# Altium PCB PCB1.PcbDoc
Units mm, origin at the board's own origin, x right, y up, seen from the top; angles counter-clockwise.
Board outline 47.4 x 63.98 mm, 2 copper layers (Top Layer, Bottom Layer); 38 components, 36 nets, 134 pads, 123 vias.
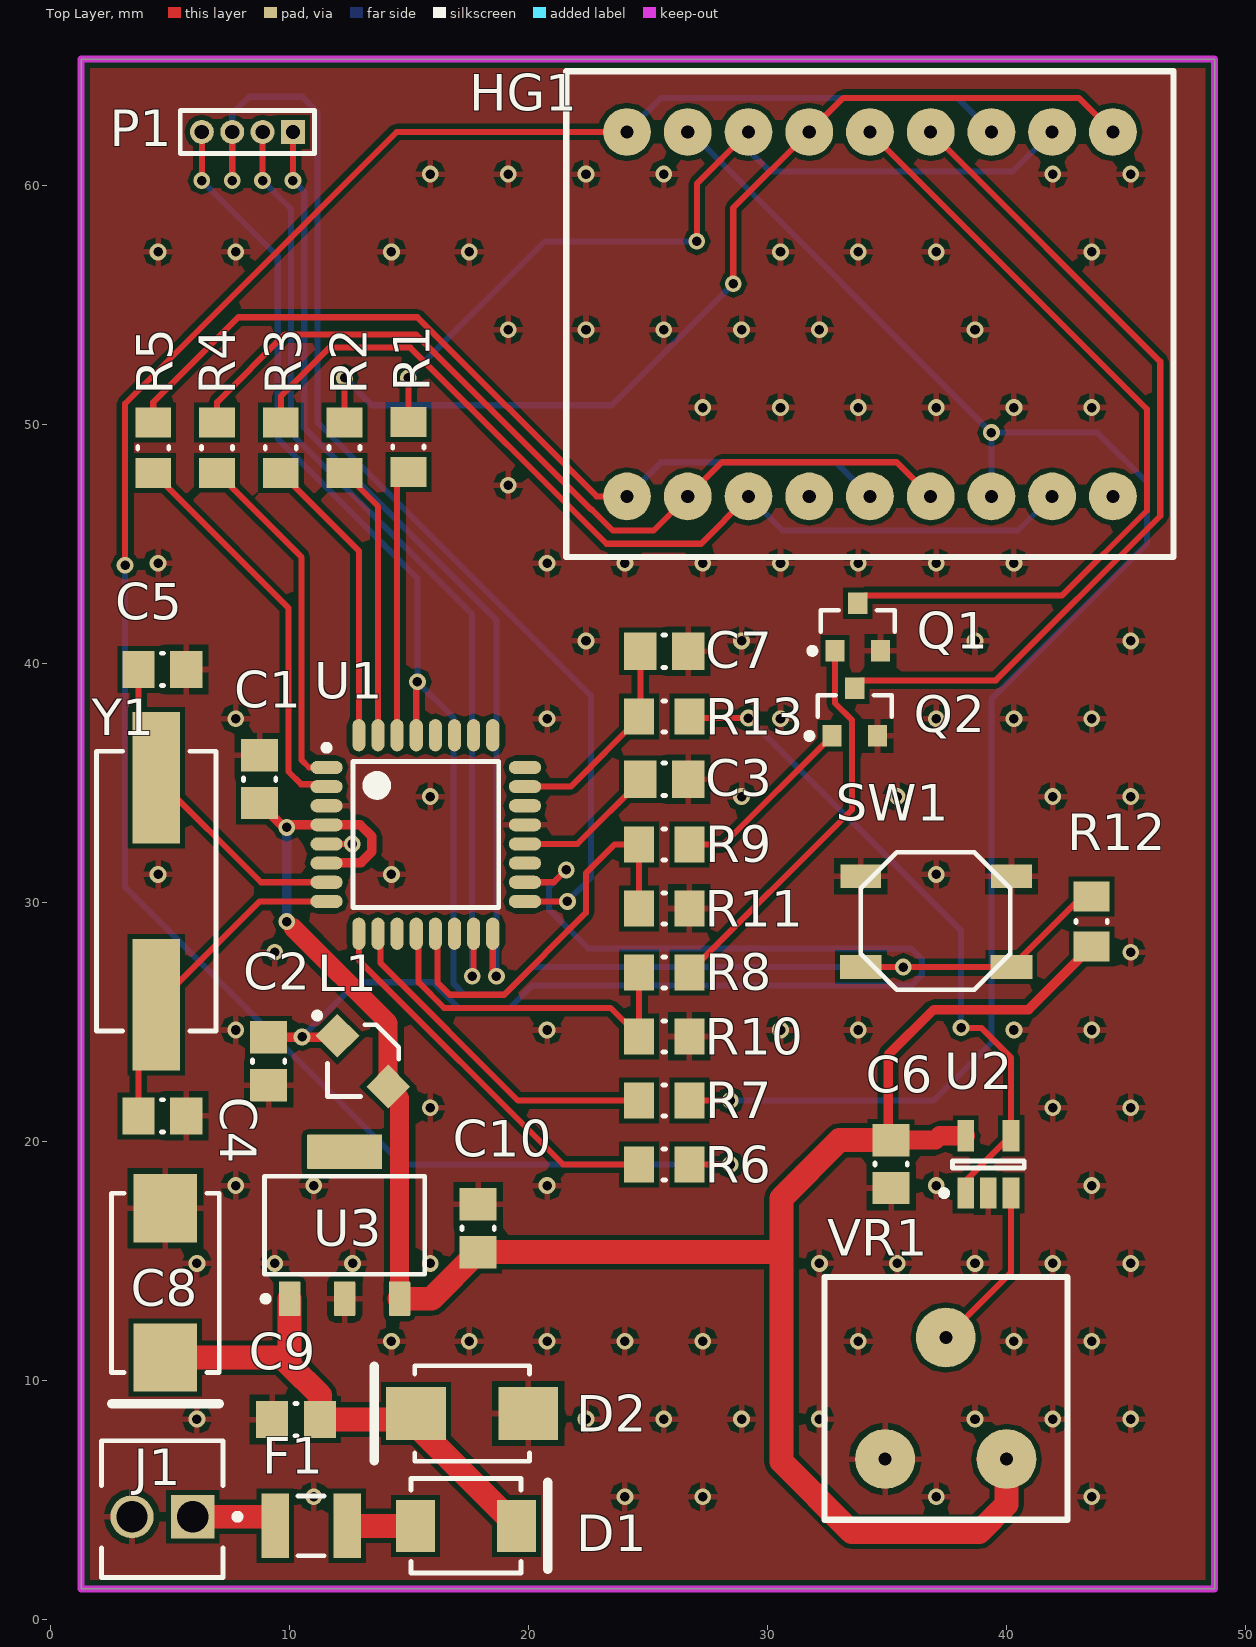
[diagram p0: Top Layer view]
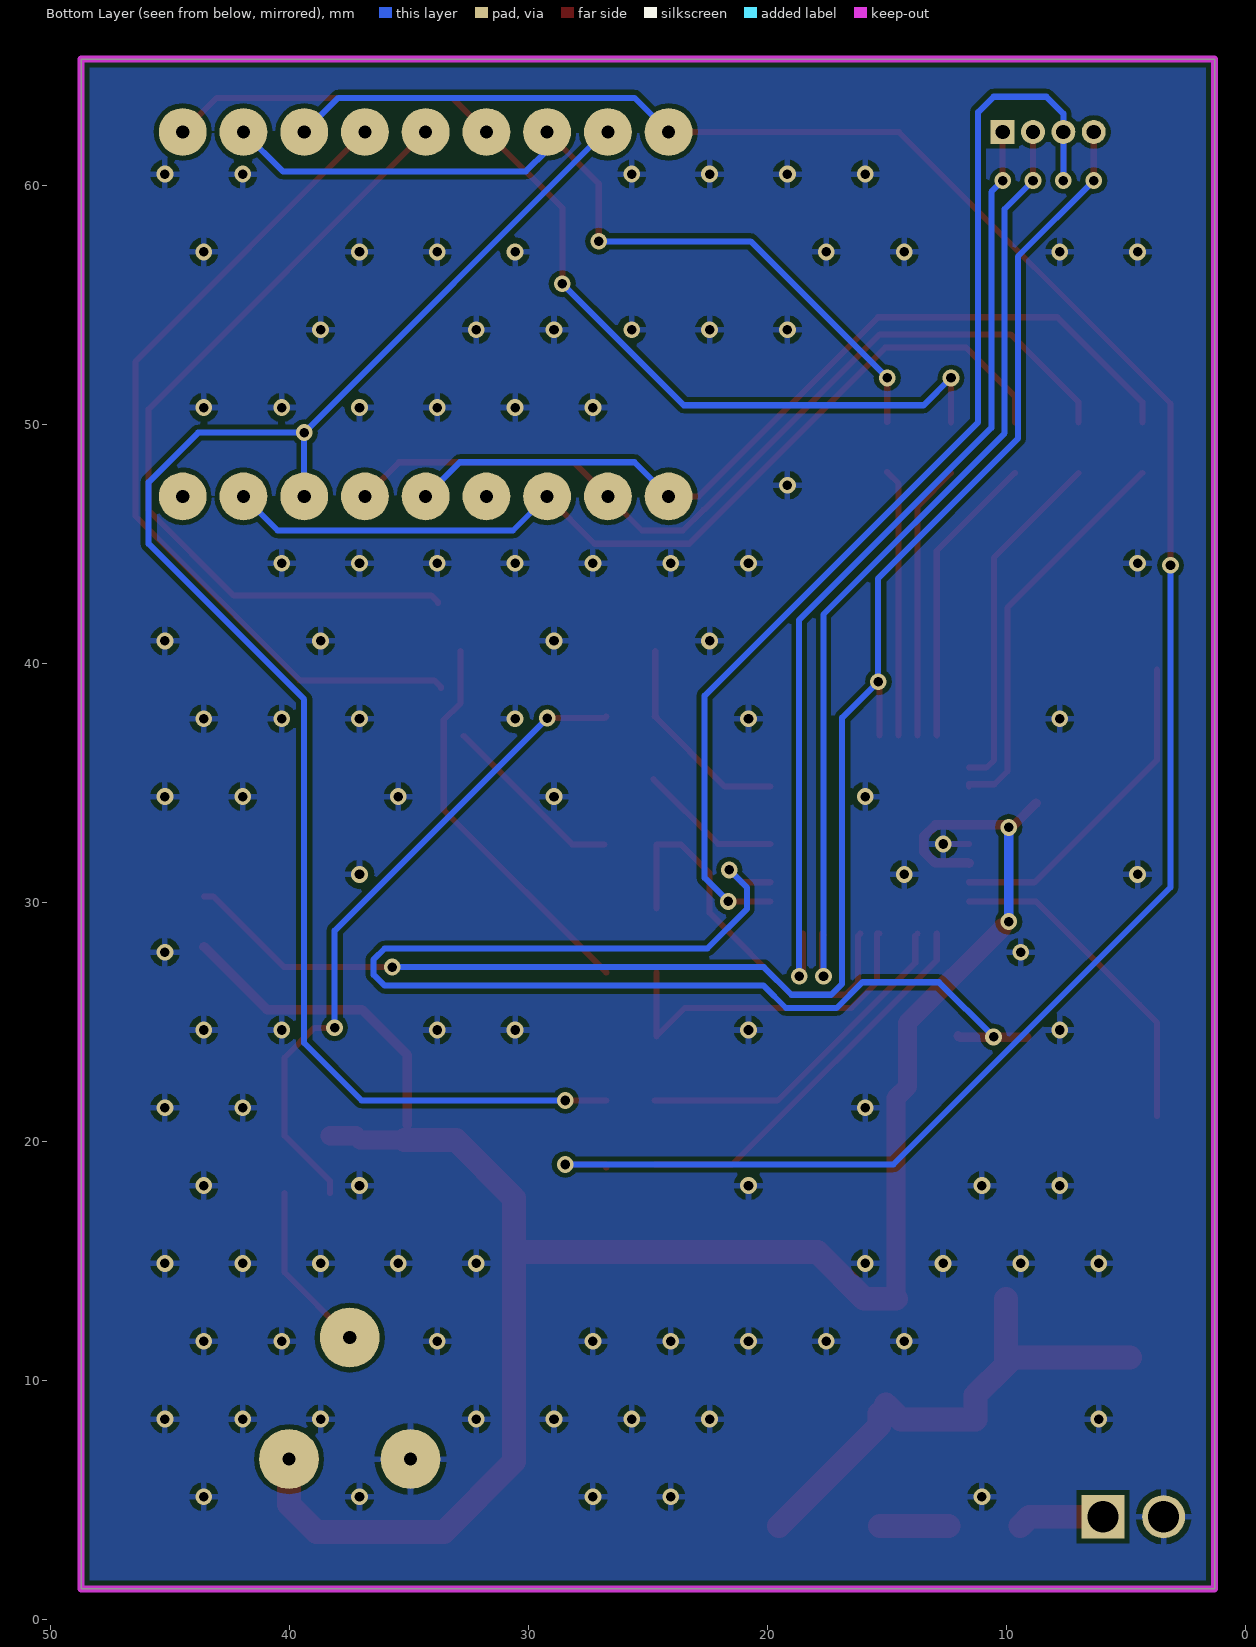
[diagram p1: Bottom Layer view, seen from below]

## Layer stack, top to bottom
Top Solder: solder mask 0.0102, Solder Resist, Dk 3.5
Top Layer: signal copper 0.0356
Dielectric 1: dielectric 0.32, FR-4, Dk 4.8
Bottom Layer: signal copper 0.0356
Bottom Solder: solder mask 0.0102, Solder Resist, Dk 3.5

## Board outline
1.3,1.3 48.7,1.3 48.7,65.278 1.3,65.278

## Design rules (kind name [scope] priority, off if disabled: settings)
Clearance [All] p1: gap=0.2 ignorepadtopadclearanceinfootprint=FALSE
PolygonConnect [All] p1: connectstyle=Relief reliefconductorwidth=0.254 reliefentries=4 polygonreliefangle="90 Angle" airgapwidth=0.254
RoutingVias [All] p1: holewidth=0.5 width=1 viastyle="Through Hole" minholewidth=0.4 minwidth=0.6 maxholewidth=0.711 maxwidth=1.27
SolderMaskExpansion [All] p1: expansion=0.102
Width [All] p1: maxlimit=5 minlimit=0.254 preferedwidth=0.254
Width Width_AVCC [InNet('NetC2_2')] p2: maxlimit=3 minlimit=0.4 preferedwidth=1
Width Width_VCC [InNet('VCC')] p3: maxlimit=3 minlimit=0.4 preferedwidth=1
30 further rules are at their usual default settings.

## Classes and differential pairs
component class programmer: P1
component class pm: C8 C9 C10 D1 D2 F1 J1 U3
component class OA: C6 C7 R13 U2 VR1
component class microcontroller: C1 C2 C3 C4 C5 HG1 L1 Q1 Q2 R1 R2 R3 R4 R5 R7 R8 R9 R12 R13 SW1 U1 Y1

## Components (designator, comment, footprint, x,y, rotation, side; value= is the part's Value field where it differs from the comment)
C1 "100nF" CAPC0805(2012)75_M 8.763,35.163 r270 top
C2 "100nF" CAPC0805(2012)75_M 9.144,23.368 r90 top
C3 "100nF" CAPC0805(2012)75_M 25.688,35.16 r180 top
C4 "22pF" CAPC0805(2012)100_M 4.699,21.082 r180 top
C5 "22pF" CAPC0805(2012)100_M 4.699,39.751 r180 top
C6 "100nF" CAPC0805(2012)75_M 35.179,19.066 r90 top
C7 "100nF" CAPC0805(2012)75_M 25.688,40.513 r180 top
C8 "293D476X0025D2TE3" AVX-7343-31_M 4.826,14.097 r90 top
C9 "330pF" CAPC0805(2012)100_M 10.287,8.382 r0 top
C10 "100nF" CAPC0805(2012)75_M 17.907,16.383 r270 top
D1 "STPS2L25U" STM-SMB_P_V 17.399,3.937 r0 top
D2 "SMBJ12A" FAIR-DO-214AA-2_V 17.653,8.636 r180 top
F1 "1210L050YR" "fuse - duplicate" 10.922,3.937 r0 top
HG1 "DC56-11SRWA" 7seg_LCD 24.13,46.99 r90 top
J1 "640456-2" TECO-640456-2_V 4.699,4.318 r0 top
L1 "CDRH2D18" SUMI-CDRH2D14NP-1R5NC-2_V 13.081,23.368 r0 top
P1 "MHDR1X4" MHDR1X4 10.16,62.23 r180 top
Q1 "IRLML2060TRPBF" INTR-IRLML2402TRPBF-3_V 33.782,41.529 r90 top
Q2 "IRLML2060TRPBF" INTR-IRLML2402TRPBF-3_V 33.655,37.973 r90 top
R1 "140R" RESC0805(2012)_M 14.986,49.056 r90 top value="140.00 Ohm"
R2 "140R" RESC0805(2012)_M 12.319,49.022 r90 top value="140.00 Ohm"
R3 "140R" RESC0805(2012)_M 9.652,49.022 r90 top value="140.00 Ohm"
R4 "140R" RESC0805(2012)_M 6.985,49.022 r90 top value="140.00 Ohm"
R5 "140R" RESC0805(2012)_M 4.318,49.022 r90 top value="140.00 Ohm"
R6 "140R" RESC0805(2012)_M 25.688,19.05 r0 top value="140.00 Ohm"
R7 "140R" RESC0805(2012)_M 25.688,21.727 r0 top value="140.00 Ohm"
R8 "270R" RESC0805(2012)_M 25.688,27.08 r0 top value="270.00 Ohm"
R9 "270R" RESC0805(2012)_M 25.688,32.433 r0 top value="270.00 Ohm"
R10 "10K" RESC0805(2012)_M 25.688,24.403 r180 top value="10000.00 Ohm"
R11 "10K" RESC0805(2012)_M 25.688,29.756 r180 top value="10000.00 Ohm"
R12 "10K" RESC0805(2012)_M 43.561,29.21 r270 top value="10000.00 Ohm"
R13 "330R" RESC0805(2012)_M 25.688,37.786 r180 top value="330.00 Ohm"
SW1 "8-1437565-1" SW-SPST-NO-4 33.909,31.105 r0 top
U1 "ATmega8-16AU" 32A_L 15.716,32.852 r0 top
U2 "AD8605ARTZ-REEL7" ADI-RJ-5_M 39.243,19.05 r90 top
U3 "LM340MP-5.0/NOPB" DCY0004A_L 12.319,16.51 r90 top
VR1 "RES-POT-3" RES-POT-3 37.465,11.811 r0 top
Y1 "KX-K 16.0 MHz" FOX-HC49SDLF_V 4.445,30.48 r90 top

## Footprints (in the part's own frame and the unit in brackets; to place one, negate y for a bottom-side part, rotate by r counter-clockwise, add the part's x,y. Pads: shape width x height; smd on the part's side, far side on the other; paste and mask are expansions set on the pad)
7seg_LCD [mm]
  round 2 hole 0.55: 1(0,0) 2(0,-2.54) 3(0,-5.08) 4(0,-7.62) 5(0,-10.16) 6(0,-12.7) 7(0,-15.24) 8(0,-17.78) 9(0,-20.32) 10(15.24,-20.32) 11(15.24,-17.78) 12(15.24,-15.24) 13(15.24,-12.7) 14(15.24,-10.16) 15(15.24,-7.62) 16(15.24,-5.08) 17(15.24,-2.54) 18(15.24,0)
  silkscreen extent -2.54,-22.86 17.78,2.54
32A_L [mm] "Thin QFP, 32-Leads, Body 7x7mm, Pitch 0.8mm, IPC High Density"
  oval 1.35x0.55 smd: 1(-4.15,2.8) 2(-4.15,2) 3(-4.15,1.2) 4(-4.15,0.4) 5(-4.15,-0.4) 6(-4.15,-1.2) 7(-4.15,-2) 8(-4.15,-2.8) 17(4.15,-2.8) 18(4.15,-2) 19(4.15,-1.2) 20(4.15,-0.4) 21(4.15,0.4) 22(4.15,1.2) 23(4.15,2) 24(4.15,2.8)
  oval 0.55x1.35 smd: 9(-2.8,-4.15) 10(-2,-4.15) 11(-1.2,-4.15) 12(-0.4,-4.15) 13(0.4,-4.15) 14(1.2,-4.15) 15(2,-4.15) 16(2.8,-4.15) 25(2.8,4.15) 26(2,4.15) 27(1.2,4.15) 28(0.4,4.15) 29(-0.4,4.15) 30(-1.2,4.15) 31(-2,4.15) 32(-2.8,4.15)
  silkscreen extent -4.27,-3.05 3.05,3.75, body extent -3.5,-3.5 3.5,3.5, height 1.2
ADI-RJ-5_M [mm] "SOT-23, 5-Leads, Body 2.9x1.6mm, Pitch 0.95mm, IPC Low Density"
  rect 1.3x0.7 smd: 1(-1.2,0.95) 2(-1.2,0) 3(-1.2,-0.95) 4(1.2,-0.95) 5(1.2,0.95)
  silkscreen extent -1.32,-1.5 0.15,1.97, body extent -0.85,-1.5 0.85,1.5, height 1.45
AVX-7343-31_M [mm] "Molded Capacitor, 2-Leads, Body 7.5x4.5mm, IPC Low Density"
  rect 2.85x2.65 smd: 1(-3.125,0) 2(3.125,0)
  silkscreen extent -5.05,-2.25 3.75,2.25, body extent -3.97,-2.25 3.97,2.25, height 3.1
CAPC0805(2012)75_M [mm] "Chip Capacitor, Body 2.0x1.2mm, Height 0.75mm, IPC Low Density"
  rect 1.35x1.55 smd: 1(-1,0) 2(1,0)
  silkscreen extent -0.05,-0.67 0.05,0.67, body extent -1.1,-0.72 1.1,0.72, height 0.75
CAPC0805(2012)100_M [mm] "Chip Capacitor, Body 2.0x1.2mm, Height 1.0mm, IPC Low Density"
  rect 1.35x1.55 smd: 1(-1,0) 2(1,0)
  silkscreen extent -0.05,-0.67 0.05,0.67, body extent -1.1,-0.72 1.1,0.72, height 1
DCY0004A_L [mm] "SOT223, 4-Leads, Body 6.7x3.7mm, Pitch 2.3mm, IPC High Density"
  rrect11% 1.45x0.9 smd: 1(-3.075,2.3) 2(-3.075,0) 3(-3.075,-2.3)
  rrect7% 1.45x3.15 smd: 4(3.075,0)
  silkscreen extent -3.2,-3.35 2.05,3.42, body extent -3.5,-3.25 3.5,3.25, height 1.62
FAIR-DO-214AA-2_V [mm] "Molded Diode, 2-Leads, Body 4.75x3.95mm"
  rect 2.5x2.2 smd: 1(-2.35,0) 2(2.35,0)
  silkscreen extent -2.4,-2 4.1,2, body extent -2.59,-1.97 2.6,1.98, height 2.65
FOX-HC49SDLF_V [mm] "SMD, 2-Leads, Body 5x11.7mm"
  rect 5.5x2 smd: 1(-4.75,0) 2(4.75,0)
  silkscreen extent -5.85,-2.5 5.85,2.5, body extent -6.15,-2.35 6.15,2.35, height 4.34
"fuse - duplicate" [mm] "fuse, Body 3.2x2.5mm, IPC Medium Density"
  rect 1.15x2.7 smd: 1(-1.5,0) 2(1.5,0)
  silkscreen extent -0.55,-1.25 0.55,1.25, body extent -1.7,-1.35 1.7,1.35, height 0.71
INTR-IRLML2402TRPBF-3_V [mm] "SOT23, 3-Leads, Body 3.05x1.4mm, Pitch 0.95mm"
  rect 0.9x0.8 smd: 1(-1,0.95) 2(-1,-0.95) 3(1,0)
  silkscreen extent -1.12,-1.55 0.7,2.02, body extent -0.7,-1.52 0.7,1.53, height 1.11
MHDR1X4 [mm] "Connector; Header; 4 Position"
  rect 1x1 hole 0.6: 1(0,0)
  round 1 hole 0.6: 2(1.27,0) 3(2.54,0) 4(3.81,0)
  silkscreen extent -0.9,-0.9 4.71,0.9
RES-POT-3 [mm]
  round 2.5 hole 0.55: 1(2.54,-5.08) 2(0,0) 3(-2.54,-5.08)
  silkscreen extent -5.08,-7.62 5.08,2.54
RESC0805(2012)_M [mm] "Chip Resistor, Body 2.0x1.3mm, IPC Low Density"
  rect 1.25x1.5 smd: 1(-1.05,0) 2(1.05,0)
  silkscreen extent -0.05,-0.65 0.05,0.65, body extent -1.1,-0.67 1.1,0.67, height 0.7
STM-SMB_P_V [mm] "SMB, 2-Leads, Body 4.325x3.625mm"
  rect 1.62x2.18 smd: 1(-2.11,0) 2(2.11,0)
  silkscreen extent -2.3,-1.97 3.42,1.97, body extent -2.16,-1.81 2.16,1.81, height 2.59
SUMI-CDRH2D14NP-1R5NC-2_V [mm] "Hand Drawn, 2-Leads, Body 3x3mm, Pitch 3mm"
  rect 1.3x1.3 smd rot 45: 1(-1.061,1.061) 2(1.061,-1.061)
  silkscreen extent -2.03,-1.48 1.5,2.03, body extent -1.48,-1.48 1.5,1.5, height 1.55
SW-SPST-NO-4 [mm]
  rect 1.7x1 smd: 1(0,0) 2(6.3,0)
  rect 1.75x1 smd: 3(0,-3.8) 4(6.3,-3.8)
  silkscreen extent 0,-4.75 6.25,1
TECO-640456-2_V [mm] "HDR, 2-Leads, Body 5.715x5.08mm, Pitch 2.54mm"
  rect 1.8x1.8 hole 1.3: 1(1.27,0)
  round 1.8 hole 1.3: 2(-1.27,0)
  silkscreen extent -2.54,-2.54 3.26,3.17, body extent -2.54,-2.67 2.54,3.17, height 9.4

## Part data
C1 C2 C3 C6 C7 C10: library part CMP-1036-04403-1, "CAP 100nF 16V ±20% 0805 (2012 Metric) Thickness 0.75mm SMD", Case-EIA=0805, Case-Metric=2012, Rated Voltage="16 V", Tolerance=A±20%, Max Thickness="0.75 mm", Technology=SMT
C4 C5: library part CMP-1036-01214-1, "CAP 22pF 16V ±0.25pF 0805 (2012 Metric) Thickness 1mm SMD", Case-EIA=0805, Case-Metric=2012, Rated Voltage="16 V", Tolerance=A±0.25pF, Max Thickness="1 mm", Technology=SMT
C8: library part CMP-2000-07307-1, "Tantalum Capacitor, 47 uF, +/- 10%, 25 V, -55 to 125 degC, 2-Pin SMD, Tape and Reel", Capacitance=47uF, Case Code - in=2917, Case Code - mm=7343, Leakage Current=11.8uA, Manufacturer=AVX, Maximum Operating Temperature=+125C, Mfr Case Code=DCase, Minimum Operating Temperature=-55C, Operating Temperature Range=-55Cto+125C, Package / Case=2917(7343metric), Package Description="2-Pin Surface Mount Device, Body 7.3 x 4.35 mm", Package Reference=7343-31, Ripple Current=0.4mA, Tolerance=10%, Voltage Rating=25V, Brand=AVX, Datasheet URL=https://datasheet.ciiva.com/11793/0900766b80066cb4-11793194.pdf, Datasheet Version=02/2004, Dissipation Factor DF=6, ESR=150mOhms, Height=3.1mm, Length=7.3mm, Manufacturer URL=http://www.avx.com/, Mounting Technology=SurfaceMount, Packaging=Reel, Product=TantalumSolidLowESRStandardGrade, Product Category=TantalumCapacitors-SolidSMD, Qualification=Commercial, RoHS=True, Series=TPS, Termination Style=SMD/SMT, Unit Weight=0.023634oz, Width=4.3mm
C9: library part CMP-1036-02496-1, "CAP 330pF 50V ±1% 0805 (2012 Metric) Thickness 1mm SMD", Case-EIA=0805, Case-Metric=2012, Rated Voltage="50 V", Tolerance=A±1%, Max Thickness="1 mm", Technology=SMT
D1: library part CMP-2000-07176-1, "Low Drop Power Schottky Rectifier, 2 A, 25 V, 2-Pin SMD (SMB), RoHS, Tape and Reel", Capacitance @ Vr, F=-, Current - Average Rectified (Io)=2A, Current - Reverse Leakage @ Vr=90µA@25V, Manufacturer=STMicroelectronics, Operating Temperature - Junction=150°C(Max), Package / Case=DO-214AA,SMB, Package Description="2-Pin Surface Mount Device, Body 4.325 x 3.625 mm", Package Reference=SMB_P, Standard Package=1, Supplier Device Package=SMB, Voltage - DC Reverse (Vr) (Max)=25V, Voltage - Forward (Vf) (Max) @ If=450mV@2A, Category=DiscreteSemiconductorProducts, Datasheet URL=http://www.st.com/content/ccc/resource/technical/document/datasheet/f9/71/8b/51/48/04/4b/9b/CD00001325.pdf/files/CD00001325.pdf/jcr:content/translations/en.CD00001325.pdf, Datasheet Version=02/2007, Diode Type=Schottky, Family=Diodes,Rectifiers-Single, Manufacturer URL=http://www.st.com/, Mounting Technology=SurfaceMount, Mounting Type=SurfaceMount, Online Catalog=SchottkyDiode, Other Names=497-5573-6, Other Related Documents=STPS2L25ViewAllSpecifications, Package URL=http://www.st.com/st-web-ui/static/active/en/resource/technical/document/datasheet/CD00279657.pdf, Packaging=Digi-Reel®, Reverse Recovery Time (trr)=-, Series=-, Speed=FastRecovery=200mA(Io)
D2: library part CMP-2000-07093-1, "Transient Voltage Suppressor Diode, 600 W, -55 to 150 degC, 2-Pin SMB (DO-214AA), RoHS, Tape and Reel", Capacitance @ Frequency=-, Current - Peak Pulse (10/1000µs)=30.2A, Manufacturer="Fairchild Semiconductor", Operating Temperature=-55°C~150°C(TJ), Package / Case=DO-214AA,SMB, Package Description="2-Pin Surface Mount Device, Body 4.4 x 3.625 mm", Package Reference=DO-214AA-2, Power - Peak Pulse=600W, Power Line Protection=No, Standard Package=1, Supplier Device Package=DO-214AA(SMB), Voltage - Breakdown (Min)=13.3V, Voltage - Clamping (Max) @ Ipp=19.9V, Voltage - Reverse Standoff (Typ)=12V, Applications=GeneralPurpose, Bidirectional Channels=-, Category=CircuitProtection, Datasheet URL=http://www.mouser.com/ds/2/149/SMBJ12A-196559.pdf, Datasheet Version="Rev. 1.1.1, 11/2014", EDA / CAD Models=DownloadfromAcceleratedDesigns, Family=TVS-Diodes, Manufacturer URL=https://www.fairchildsemi.com/, Mounting Technology=SurfaceMount, Mounting Type=SurfaceMount, Online Catalog=SMBJSeries, Other Names=SMBJ12AFSDKR, Packaging=Digi-Reel®, Series=SMBJ, Type=Zener, Unidirectional Channels=1
F1: library part FUSE
HG1: library part Component_1
J1: library part CMP-2000-05417-1, "Male Header, Pitch 2.54 mm, 1 x 2 Position, Height 10.49 mm, Tail Length 3.556 mm, -55 to 105 degC, RoHS, Bulk", Color=White, Current, Rating="5 /  / A", Flammability Rating=UL94V-0, Manufacturer="TE Connectivity", Temperature, Operating="-55to+105 /  / degC", Voltage, Rating="250 /  / V", Agency Approvals=CSA,UL, Angle=Straight, Brand/Series=MTA-100Series, Color, Housing=White, Connector Type=MTA-100, Contact Centerline Spacing="0.100 /  / in.", Contact Mating Area Plating=Tin, Contact Plating=Tin, Contact Shape=Square, Contact Termination Area Plating=Tin, Datasheet URL=https://datasheet.ciiva.com/11746/0900766b80eb7fdd-11746365.pdf, Datasheet Version="Rev. W, 06/2004", Length, Terminal Post="0.14 /  / in.", Manufacturer URL=http://www.te.com/, Material, Contact=CopperAlloy, Material, Housing=Polyester, Mount Angle=Vertical, Mounting Type=PCMount, Number of Contacts=2, Number of Positions=2, Number of Rows=1, Primary Type=InterconnectSystem, Size, Post="0.025 /  / in.", Special Features=Pinstrip, Standards=RoHSCompliant,ELVCompliant,UL94V-0, Termination=Solder, Type=PCBPlug
L1: library part CMP-0468-00001-2, "Power Inductor,-40 to 100 degC, 3.2 x 3.2 x 1.55 mm, SMD", Inductance(uH)[within]="1.5+/- 30%", Manufacturer=Sumida, Operating Temperature Range="-40 to 100 degC", PartNumber=CDRH2D14NP-1R5NC, Saturation Current(A)at 20 degC=1.8, Saturation Current(A)at 100degC=1.2, Temperature Rise Current(A)=2, ComponentLink1Description="Manufacturer URL", ComponentLink1URL=http://www.sumida.com, ComponentLink2Description=Datasheet, ComponentLink2URL=http://www.sumida.com/products/pdf/CDRH2D14.pdf, ComponentLink3Description="Package Specification", ComponentLink3URL=http://www.sumida.com/products/pdf/CDRH2D14.pdf, D.C.R.(mOhm) Max.(Typ.)(at 20 degC)=63(50), DatasheetVersion=17.09.12, Mounting Technology="Surface Mount", PackageDescription="2-Pin Hand Drawn, Body 3 x 3mm, Pitch 3 mm", PackageReference=CDRH2D14NP-1R5NC-2, Packing="Tape and Reel", Stamp=A
P1: "Header, 4-Pin", LatestRevisionDate=17-Jul-2002, LatestRevisionNote="Re-released for DXP Platform.", Publisher="Altium Limited"
Q1 Q2: library part CMP-2000-05155-1, "HEXFET(R) Power MOSFET, N-Channel, 20 V, 1.2 A, 3-Pin SOT-23, RoHS, Tape and Reel", Continuous Drain Current Id=1.2A, Current Temperature=25degC, Drain Source Voltage Vds=20V, Junction Temperature Tj Min=-55degC, Manufacturer="International Rectifier", On Resistance Rds(on)=250mohm, Operating Temperature Range=-55degCto+150degC, Package / Case=SOT-23, Power Dissipation Pd=540mW, Pulse Current Idm=7.4A, Rds(on) Test Voltage Vgs=4.5V, Threshold Voltage Vgs Typ=700mV, Current Id Max=1.2A, Datasheet URL=https://datasheet.ciiva.com/29326/162826-da-01-en-irlml-2402tr-29326791.pdf, Datasheet Version=Jan-03, External Depth=2.5mm, External Length / Height=1.12mm, External Width=3.05mm, Full Power Rating Temperature=25degC, Manufacturer URL=http://internationalrectifier.com/, No. of Pins=3, No. of Transistors=1, Reel Quantity=3000, SMD Marking=1A, SVHC=NoSVHC(19-Dec-2012), Tape Width=8mm, Termination Type=SMD, Transistor Case Style=SOT-23, Transistor Polarity=NChannel, Voltage Vds Typ=20V, Voltage Vgs Max=700mV, Voltage Vgs Rds on Measurement=4.5V, Voltage Vgs th Min=700mV
R1 R2 R3 R4 R5 R6 R7: library part CMP-1013-00412-1, "140R 0.125W 1% 0805 (2012 Metric)  SMD", Case-EIA=0805, Case-Metric=2012, Power="0.125 W", Tolerance="1 %", Technology=SMT
R8 R9: library part CMP-1013-00060-1, "270R 0.125W 5% 0805 (2012 Metric)  SMD", Case-EIA=0805, Case-Metric=2012, Power="0.125 W", Tolerance="5 %", Technology=SMT
R10 R11 R12: library part CMP-1013-00098-1, "10K 0.125W 5% 0805 (2012 Metric)  SMD", Case-EIA=0805, Case-Metric=2012, Power="0.125 W", Tolerance="5 %", Technology=SMT
R13: library part CMP-1013-00062-1, "330R 0.125W 5% 0805 (2012 Metric)  SMD", Case-EIA=0805, Case-Metric=2012, Power="0.125 W", Tolerance="5 %", Technology=SMT
SW1: library part SW-SPST-NO-4
U1: library part CMP-0095-00565-1, "8-bit AVR Microcontroller, 4.5-5.5V, 16MHz, 8KB Flash, 512 Bytes EEPROM, 1KB SRAM, 32-pin TQFP, Industrial Grade (-40°C to 85°C)", Code_JEDEC=MS-026-ABA, ComponentLink1Description="Manufacturer URL", ComponentLink1URL=http://www.atmel.com/, ComponentLink2Description=ATmega8(L), ComponentLink2URL=http://www.atmel.com/dyn/resources/prod_documents/doc2486.pdf, ComponentLink3Description="ATmega8(L) Summary", ComponentLink3URL=http://www.atmel.com/dyn/resources/prod_documents/2486S.pdf, DatasheetVersion="revZ, Feb-2011", PackageDescription="32-Lead, 7x7x1.0 mm Body, 0.8mm Lead Pitch, Thin Profile Plastic Quad Flat Package (TQFP)", PackageReference=32A, PackageVersion="revC, Oct-2010"
U2: library part CMP-0384-01494-2, "Single Channel Wide Bandwidth Operational Amplifier, 10 MHz BW, 5 V/us SR, Industrial, 5-pin SOT23 (RJ-5), Reel", Amplifiers Per Package=1, Generic Part Number=AD8605, Input Bias Current=200fA, Input Offset Voltage=20uV, Manufacturer="Analog Devices", Code_JEDEC=MO-178-AA, ComponentLink1Description="Manufacturer URL", ComponentLink1URL=http://www.analog.com/en/index.html, ComponentLink2Description=Datasheet, ComponentLink2URL=http://www.analog.com/static/imported-files/data_sheets/AD8605_8606_8608.pdf, ComponentLink3Description="Package Specification", ComponentLink3URL=http://www.analog.com/static/imported-files/packages/PKG_PDF/SOT-23(RJ)/RJ_5.pdf, ComponentLink4Description="Reference Circuit", ComponentLink4URL=http://www.analog.com/en/all-operational-amplifiers-op-amps/operational-amplifiers-op-amps/ad8605/products/product.html#product-recommendations, DatasheetVersion="Rev. L", Iq/Amp=1.2mA, Mounting Technology="Surface Mount", PackageDescription="5-Pin Small Outline Transistor Package, Body 2.9 x 1.6 mm, Pitch 0.95 mm", PackageReference=RJ-5, PackageVersion=121608-A, PartNumber=AD8605ARTZ-REEL7, RevisionNote="Reference Circuit URL fixed", Slew Rate=5V/us, Small Signal Bandwidth=10MHz, V Span Max=6V, V Span Min=2.7V
U3: library part CMP-0062-01784-3, "Series 3-Terminal Positive Regulators, 4-pin SOT-223, Pb-Free", Manufacturer="Texas Instruments", PackageTopMarking=XYTT*N00A, PowerWise=N, Code_IPC=SOT223-4, Code_JEDEC=TO-261-AA, ComponentLink1Description="Datasheet URL", ComponentLink1URL=http://www.ti.com/general/docs/lit/getliterature.tsp?genericPartNumber=LM340-N&fileType=pdf, CompType="LDO IC", PackageDescription="Molded SOT-223, 6.50 x 3.56 x 1.6mm Body, 4 Lead, 2.3mm Pitch", PackageReference=DCY0004A, PinCount=4, RoHS=Y
Y1: library part CMP-2100-03639-1, "Resistance Weld Crystal, 8 MHz, +/- 30 ppm, -20 to 70 degC, 2-Pin SMD, RoHS, Tape and Reel", Case/Package=SMD/SMT, ESR (Equivalent Series Resistance)=80Ohm, Frequency=8MHz, Frequency Stability=50ppm, Frequency Tolerance=30ppm, Load Capacitance=20pF, Manufacturer="FOX Electronics", Max Operating Temperature=70degC, Min Operating Temperature=-20degC, Package Description="2-Pin Surface Mount Device, Body 5 x 11.7 mm", Package Quantity=1000, Package Reference=HC49SDLF, Datasheet URL=http://www.foxonline.com/pdfs/hc49sdlf.pdf, Datasheet Version=42064.0, Depth=5mm, Height=4.5mm, Lead Free=LeadFree, Length=11.7mm, Manufacturer URL=http://www.foxonline.com/, Mount=SurfaceMount, Number of Pins=2, Packaging=TapeandReel, Radiation Hardening=No, REACH SVHC=NoSVHC, RoHSCompliant=True, Series Resistance=80Ohm, Termination=SMD/SMT, Tolerance=50ppm, Width=5mm
VR1: Potentiometer=10K

## Via types
v1: diameter 0.7, hole 0.4, Top Layer to Bottom Layer, 123 vias

## Nets (pads, with @x,y where several pads share a name; then routed paths per layer and width w, separated by ;. In a path a pad name is that pad's centre, name@x,y a point inside that pad or via, vN(x,y) a via of type N, cw(c..) or ccw(c..) an arc to the next point about the centre after c; other vN are vias at no path point)
a: HG1.11 HG1.16 R1.2 | length 35.5
  Top Layer w0.254: R1.2 v1(14.986,51.943) ; v1(27.051,57.658) 27.051,60.071 HG1.16
  Bottom Layer w0.254: v1(14.986,51.943) 20.701,57.658 v1(27.051,57.658) ; HG1.16@29.21,61.468 30.099,60.579 40.259,60.579 HG1.11
ADC: C7.2 R13.2 U1.23 | length 8.8
  Top Layer w0.254: U1.23 21.781,34.852 R13.2@24.715,37.786 ; R13.2 24.688,37.836 C7.2
b: HG1.10 HG1.15 R2.2 | length 42.3
  Top Layer w0.254: R2.2 v1(12.319,51.943) ; v1(28.575,55.88) 28.575,59.055 HG1.15 33.177,63.657 43.023,63.657 HG1.10
  Bottom Layer w0.254: v1(12.319,51.943) 13.462,50.8 23.495,50.8 v1(28.575,55.88)
c: HG1.3 HG1.8 R3.2 | length 39.6
  Top Layer w0.254: R3.2 9.652,51.181 11.684,53.213 15.07,53.213 23.274,45.009 27.229,45.009 HG1.3
  Bottom Layer w0.254: HG1.3 30.637,45.563 40.483,45.563 HG1.8
cc1: HG1.14 Q1.3 | length 34.4
  Top Layer w0.254: Q1.3 33.782,42.579 34.055,42.852 42.33,42.852 45.877,46.399 45.877,50.643 HG1.14
cc2: HG1.13 Q2.3 | length 35.8
  Top Layer w0.254: Q2.3 33.655,39.023 33.928,39.296 39.558,39.296 46.431,46.169 46.431,52.629 HG1.13
d: HG1.2 HG1.6 R4.2 | length 37
  Top Layer w0.254: R4.2 6.985,50.927 9.825,53.767 15.3,53.767 22.631,46.436 22.666,46.436 23.539,45.563 25.243,45.563 HG1.2 28.097,48.417 35.403,48.417 HG1.6
e: HG1.1 HG1.5 R5.2 | length 36.6
  Top Layer w0.254: R5.2 4.318,50.927 7.874,54.483 15.367,54.483 22.86,46.99 HG1.1
  Bottom Layer w0.254: HG1.1 25.557,48.417 32.863,48.417 HG1.5
f: HG1.12 HG1.18 R6.2 | length 94.3
  Top Layer w0.254: v1(3.141,44.109) 3.141,50.874 14.497,62.23 HG1.18 ; R6.2@26.738,18.925 R6.2 v1(28.448,19.05)
  Bottom Layer w0.254: v1(3.141,44.109) 3.141,30.641 14.732,19.05 v1(28.448,19.05) ; HG1.18 25.557,63.657 37.943,63.657 HG1.12
g: HG1.7 HG1.17 R7.2 | length 67.7
  Top Layer w0.254: R7.2 v1(28.448,21.727)
  Bottom Layer w0.254: HG1.17 26.797,62.23 v1(39.37,49.657) ; v1(28.448,21.727) 36.967,21.727 39.37,24.13 39.37,38.502 45.877,45.009 45.877,47.581 43.801,49.657 v1(39.37,49.657) ; HG1.7 v1(39.37,49.657)
GND: C1.1 C2.1 C3.1 C4.1 C5.1 C6.1 C7.1 C8.2 C9.1 C10.1 D2.1 J1.2 Q1.2 Q2.2 R10.1 R11.1 SW1.1 SW1.2 U1.3 U1.5 U1.21 U2.2 U3.2 VR1.3 | length 1.1
  Top Layer w0.254: U1.5 v1(12.64,32.452)
  other v1: 11.026,5.15 24.042,5.15 27.296,5.15 37.058,5.15 43.566,5.15 6.145,8.404 22.415,8.404 25.669,8.404 28.923,8.404 32.177,8.404 38.685,8.404 41.939,8.404 45.193,8.404 14.28,11.658 17.534,11.658 20.788,11.658 24.042,11.658 27.296,11.658 33.804,11.658 40.312,11.658 43.566,11.658 6.145,14.912 9.399,14.912 12.653,14.912 15.907,14.912 32.177,14.912 35.431,14.912 38.685,14.912 41.939,14.912 45.193,14.912 7.772,18.166 11.026,18.166 20.788,18.166 37.058,18.166 43.566,18.166 15.907,21.42 41.939,21.42 45.193,21.42 7.772,24.674 20.788,24.674 30.55,24.674 33.804,24.674 40.312,24.674 43.566,24.674 9.399,27.928 45.193,27.928 4.518,31.182 14.28,31.182 37.058,31.182 15.907,34.436 28.923,34.436 35.431,34.436 41.939,34.436 45.193,34.436 7.772,37.69 20.788,37.69 30.55,37.69 37.058,37.69 40.312,37.69 43.566,37.69 22.415,40.944 28.923,40.944 38.685,40.944 45.193,40.944 4.518,44.198 20.788,44.198 24.042,44.198 27.296,44.198 30.55,44.198 33.804,44.198 37.058,44.198 40.312,44.198 19.161,47.452 27.296,50.706 30.55,50.706 33.804,50.706 37.058,50.706 40.312,50.706 43.566,50.706 19.161,53.96 22.415,53.96 25.669,53.96 28.923,53.96 32.177,53.96 38.685,53.96 4.518,57.214 7.772,57.214 14.28,57.214 17.534,57.214 30.55,57.214 33.804,57.214 37.058,57.214 43.566,57.214 15.907,60.468 19.161,60.468 22.415,60.468 25.669,60.468 41.939,60.468 45.193,60.468
MISO: P1.1 U1.16 | length 40.7
  Top Layer w0.254: v1(10.16,60.198) P1.1 ; U1.16 18.516,27.077 v1(18.669,26.924)
  Bottom Layer w0.254: v1(10.16,60.198) 10.633,59.725 10.633,49.862 18.669,41.826 v1(18.669,26.924)
MOSI: P1.2 U1.15 | length 40.8
  Top Layer w0.254: v1(8.89,60.198) P1.2 ; v1(17.653,26.924) 17.716,26.987 U1.15 U1.15@17.653,28.639
  Bottom Layer w0.254: v1(8.89,60.198) 10.079,59.009 10.079,49.632 17.653,42.058 v1(17.653,26.924)
NetC2_2: C2.2 L1.1 U1.18 | length 51.8
  Top Layer w0.254: U1.18 21.073,30.852 v1(21.59,31.369)
  Top Layer w0.4: C2.2 11.96,24.368 L1.1
  Bottom Layer w0.254: v1(10.541,24.384) 12.827,26.67 16.025,26.67 17.102,25.593 19.22,25.593 20.155,26.528 36.009,26.528 36.464,26.983 36.464,27.627 36.009,28.082 22.508,28.082 20.86,29.73 20.86,30.639 v1(21.59,31.369)
NetC3_2: C3.2 U1.20 | length 6
  Top Layer w0.254: U1.20 22.057,32.452 C3.2@24.765,35.16
NetC4_2: C4.2 U1.8 Y1.1 | length 13.9
  Top Layer w0.254: C4.2 3.699,24.984 Y1.1 8.767,30.052 U1.8
NetC5_2: C5.2 U1.7 Y1.2 | length 13.8
  Top Layer w0.254: C5.2 3.699,35.976 Y1.2 8.823,30.852 U1.7
NetC8_1: C8.1 C9.2 D1.2 D2.2 U3.1 | length 21.4
  Top Layer w1: C8.1 9.715,10.972 10.019,10.668 ; U3.1 10.019,10.668 ; D2.2@15.049,9.017 14.414,8.382 C9.2 11.287,9.4 10.019,10.668 ; D2.2 15.303,8.143 D1.2
NetD1_1: D1.1 F1.2 | length 2.9
  Top Layer w1: F1.2 D1.1
NetF1_1: F1.1 J1.1 | length 3.6
  Top Layer w1: J1.1 9.041,4.318 F1.1
NetQ1_1: Q1.1 R8.2 | length 16.6
  Top Layer w0.254: R8.2 33.532,33.874 33.532,37.642 32.828,38.346 32.828,40.529 Q1.1
NetQ2_1: Q2.1 R9.2 | length 7.8
  Top Layer w0.254: R9.2@26.815,32.433 28.165,32.433 Q2.1
NetR1_1: R1.1 U1.30 | length 11.2
  Top Layer w0.254: U1.30 14.516,47.536 R1.1
NetR2_1: R2.1 U1.31 | length 11.5
  Top Layer w0.254: R2.1 13.716,46.575 U1.31
NetR3_1: R3.1 U1.32 | length 12.3
  Top Layer w0.254: R3.1 12.916,44.708 U1.32
NetR4_1: R4.1 U1.1 | length 14.6
  Top Layer w0.254: R4.1 10.519,44.438 10.519,35.963 10.83,35.652 U1.1
NetR5_1: R5.1 U1.2 | length 16.7
  Top Layer w0.254: R5.1 9.965,42.325 9.965,35.484 10.499,34.95 11.566,34.95 U1.2
NetR6_1: R6.1 U1.9 | length 16.4
  Top Layer w0.254: U1.9 12.916,27.597 21.463,19.05 R6.1 R6.1@24.715,19.05
NetR7_1: R7.1 U1.10 | length 14.5
  Top Layer w0.254: U1.10 13.814,28.604 13.814,27.482 19.57,21.727 R7.1 R7.1@24.715,21.727
NetR8_1: R8.1 R10.2 U1.12 | length 15
  Top Layer w0.254: U1.12 15.414,28.702 15.414,26.666 16.487,25.593 23.448,25.593 R10.2 R8.1
NetR9_1: R9.1 R11.2 U1.13 | length 17
  Top Layer w0.254: U1.13 16.214,28.604 16.214,26.649 16.716,26.147 18.991,26.147 22.414,29.57 22.414,31.23 23.617,32.433 R9.1 R11.2
NetR13_1: R13.1 U2.1 U2.4 | length 28.2
  Top Layer w0.254: R13.1 26.805,37.719 v1(29.21,37.719) ; v1(38.1,24.765) 38.945,24.765 40.193,23.517 U2.4 40.181,20.25 38.293,18.362 U2.1
  Bottom Layer w0.254: v1(29.21,37.719) 38.1,28.829 v1(38.1,24.765)
NetU2_3: U2.3 VR1.2 | length 7.2
  Top Layer w0.254: VR1.2 40.193,14.539 U2.3
RESET: P1.4 R12.1 SW1.3 SW1.4 U1.29 | length 72.5
  Top Layer w0.254: v1(6.35,60.198) P1.4 ; U1.29 v1@15.316,39.192 ; SW1.3 v1(35.687,27.305) SW1.4 43.164,30.26 R12.1
  Bottom Layer w0.254: v1(6.35,60.198) 9.525,57.023 9.525,49.403 15.367,43.561 v1(15.367,39.243) 16.876,37.734 16.876,26.602 17.331,26.147 18.991,26.147 20.149,27.305 v1(35.687,27.305)
SCK: P1.3 U1.17 | length 48.9
  Top Layer w0.254: v1(7.62,60.198) P1.3 ; U1.17 v1(21.637,30.052)
  Bottom Layer w0.254: v1(7.62,60.198) P1.3 7.62,62.992 8.331,63.703 10.541,63.703 11.187,63.057 11.187,50.091 22.625,38.653 22.625,31.04 v1(21.637,30.052)
VCC: C1.2 C6.2 C10.2 L1.2 R12.2 U1.4 U1.6 U2.5 U3.3 VR1.1 | length 93
  Top Layer w0.4: C1.2 9.674,33.252 U1.4 12.976,33.252 13.462,32.766 13.462,32.131 13.008,31.677 11.591,31.677 U1.6 ; C6.2@35.052,20.701 35.052,23.622 36.957,25.527 40.928,25.527 R12.2
  Top Layer w0.8: 10.16,28.956 14.142,24.974 L1.2 14.619,21.83 U3.3 ; C6.2 37.027,20.066 37.211,20.25 U2.5
  Top Layer w1: U3.3 15.959,13.435 C10.2 30.591,15.383 ; C6.2 33.02,20.066 30.591,17.637 30.591,15.383 ; VR1.1@39.243,6.731 VR1.1 40.005,4.826 38.862,3.683 33.528,3.683 30.591,6.62 30.591,15.383
  Bottom Layer w0.4: v1(9.906,29.21) v1(9.906,33.147)
pads on no net: HG1.4 HG1.9 U1.11 U1.14 U1.19 U1.22 U1.24 U1.25 U1.26 U1.27 U1.28 U3.4

## Polygon pours and split planes (outlines as drawn)
GND on Top Layer "Top Layer-gnd" (solid, pour order 1): 1.3,1.3 48.7,1.3 48.7,65.278 1.3,65.278
GND on Bottom Layer "Bottom Layer-GND" (solid, pour order 2): 1.3,1.3 48.7,1.3 48.7,65.278 1.3,65.278

## Keep-outs
Keep-Out Layer:
  the board outline again, w0.3